# EAGLE board MicroMouse_Board (EAGLE 8.6.0)

Size 100 x 82.54 mm. Coordinates in mm from the lower left corner, seen from the top.
Outline: 1.27,0 100,0 100,82.54 0,82.54 1.27,0
Copper layers (1*16): Top 0.035mm / dielectric 1.5mm / Bottom 0.035mm
Design rules "default": minimum track width 6mil, minimum drill 0.35mm, track to track 6mil, track to pad 6mil, pad to pad 6mil, via to via 6mil, smd to smd 6mil, copper to edge 40mil, drill to drill 6mil, minimum pad ring 10mil, minimum via ring 8mil, stop-mask expansion 4mil, vias tented up to drill 0mil, thermal gap 10mil

## Footprints (pad centres in the part's own frame; a part is rotated, then mirrored left to right if it is on the bottom)
POLOLU_BUTTON = drill 1 pad 1.778: P$1 -3.25,0; P$2 3.25,0
B3B-PH-K-S = drill 1 pad 1.676 square: BAT_+ 2,0; BAT_- -2,0; NC 0,0
EIA3528 = smd 1.2 x 2.5: A 1.65,0; C -1.65,0
0805 = smd 0.8 x 1.2: 1 -0.9,0; 2 0.9,0
2X4 = drill 1.016 pad 1.88 octagon: 1 -3.81,-1.27; 2 -3.81,1.27; 3 -1.27,-1.27; 4 -1.27,1.27; 5 1.27,-1.27; 6 1.27,1.27; 7 3.81,-1.27; 8 3.81,1.27
EMITTER = drill 0.8 pad 1.422: EM_+ -1.397,0.016; EM_- 1.143,0.016
LED-0805 = smd 0.8 x 1.2: A -0.9,0; C 0.9,0
MOTOR_ENCODER_HEADER = drill 1 pad 1.676: ENC_A 2.54,1.27; ENC_B 2.54,-1.27; ENC_GND 0,-1.27; ENC_VDD 0,1.27; MTR+ -2.54,1.27; MTR_- -2.54,-1.27
POLOLU_SWITCH = drill 1 pad 1.676 square: PIN1 -2.54,0; PIN2 0,0; PIN3 2.54,0
RECEIVER = drill 0.8 pad 1.422: RE_+ -1.27,0; RE_- 1.27,0
SOT223 = smd 1.219 x 2.235: GND 0,-3.099; IN -2.311,-3.099; OUT 2.311,-3.099 | smd 3.6 x 2.2: GND2 0,3.099
5V_REG_MURATA = drill 1 pad 1.676: GND 0,0; IN -3.175,0; OUT 3.175,0
LQFP64 = smd 0.3 x 1.3: BOOT0 -1.75,5.75; PA3 -3.75,-5.75; PA4 -2.25,-5.75; PA5 -1.75,-5.75; PA6 -1.25,-5.75; PA7 -0.75,-5.75; PA14 3.75,5.75; PA15 3.25,5.75; PB0 0.75,-5.75; PB1 1.25,-5.75; PB2 1.75,-5.75; PB3 0.75,5.75; PB4 0.25,5.75; PB5 -0.25,5.75; PB6 -0.75,5.75; PB7 -1.25,5.75; PB8 -2.25,5.75; PB9 -2.75,5.75; PB10 2.25,-5.75; PC4 -0.25,-5.75; PC5 0.25,-5.75; PC10 2.75,5.75; PC11 2.25,5.75; PC12 1.75,5.75; PD2 1.25,5.75; VCAP_1 2.75,-5.75; VDD_0 -2.75,-5.75; VDD_1 3.75,-5.75; VDD_3 -3.75,5.75; VSS_0 -3.25,-5.75; VSS_1 -3.25,5.75; VSS_2 3.25,-5.75 | smd 1.3 x 0.3: NRST -5.75,0.75; PA0_WKUP -5.75,-2.75; PA1 -5.75,-3.25; PA2 -5.75,-3.75; PA8 5.75,0.25; PA9 5.75,0.75; PA10 5.75,1.25; PA11 5.75,1.75; PA12 5.75,2.25; PA13 5.75,2.75; PB12 5.75,-3.75; PB13 5.75,-3.25; PB14 5.75,-2.75; PB15 5.75,-2.25; PC0 -5.75,0.25; PC1 -5.75,-0.25; PC2 -5.75,-0.75; PC3 -5.75,-1.25; PC6 5.75,-1.75; PC7 5.75,-1.25; PC8 5.75,-0.75; PC9 5.75,-0.25; PC13 -5.75,3.25; PC14 -5.75,2.75; PC15 -5.75,2.25; PH0 -5.75,1.75; PH1 -5.75,1.25; VBAT -5.75,3.75; VDD_2 5.75,3.75; VDDA -5.75,-2.25; VSS_3 5.75,3.25; VSSA -5.75,-1.75
TC4427_SOIC8 = smd 0.61 x 2.21: GND 0.635,-2.54; IN_A -0.635,-2.54; IN_B 1.905,-2.54; NC1 -1.905,-2.54; NC2 -1.905,2.54; OUT_A -0.635,2.54; OUT_B 1.905,2.54; VDD 0.635,2.54
ULN2003A = smd 1.55 x 0.3: 1B -2.8,2.275; 1C 2.8,2.275; 2B -2.8,1.625; 2C 2.8,1.625; 3B -2.8,0.975; 3C 2.8,0.975; 4B -2.8,0.325; 4C 2.8,0.325; 5B -2.8,-0.325; 5C 2.8,-0.325; 6B -2.8,-0.975; 6C 2.8,-0.975; 7B -2.8,-1.625; 7C 2.8,-1.625; COM 2.8,-2.275; GND -2.8,-2.275
ZXMHC3 = smd 0.61 x 2.21: N1D/P1D -0.635,-2.54; N1G -1.905,-2.54; N1S/N2S 0.635,-2.54; N2D/P2D 0.635,2.54; N2G 1.905,-2.54; P1G -1.905,2.54; P1S/P2S -0.635,2.54; P2G 1.905,2.54

## Placement (x,y rotation side)
B1  POLOLU_BUTTON  [POLOLU_BUTTON]  92.71,49.53 0 top
B2  POLOLU_BUTTON  [POLOLU_BUTTON]  92.71,55.88 0 top
BAT_JST-PH  3PIN  [B3B-PH-K-S]  95.25,24.13 90 top
C1  47uF  [EIA3528]  95.25,41.91 0 top
C2  47uF  [EIA3528]  77.47,66.04 90 top
C3  47uF  [EIA3528]  30.48,58.42 90 top
C4  1.0uF  [0805]  74.93,33.02 0 top
C5  1.0uF  [0805]  74.93,60.96 0 top
C6  0.1uF  [0805]  25.4,30.48 90 top
C7  0.1uF  [0805]  34.29,30.48 180 top
C8  0.1uF  [0805]  48.26,38.1 180 top
C9  2.2uF  [0805]  48.26,41.91 180 top
C10  0.1uF  [0805]  48.26,45.72 180 top
C11  10uF  [0805]  36.83,63.5 180 top
C12  0.1uF  [0805]  30.48,30.48 180 top
C2000  0.1uF  [0805]  30.48,50.8 90 top
COMM1  M04X2  [2X4]  33.02,22.86 0 top
EM_1  SFH4545  [EMITTER]  35.56,6.35 90 top
EM_2  SFH4545  [EMITTER]  8.89,33.02 180 top
EM_3  SFH4545  [EMITTER]  10.16,50.8 0 top
EM_4  SFH4545  [EMITTER]  36.83,76.2 90 top
LED1  LED  [LED-0805]  11.43,36.83 180 top
LED2  LED  [LED-0805]  11.43,41.91 180 top
LED3  LED  [LED-0805]  11.43,46.99 180 top
LED_LOW_BAT  LED  [LED-0805]  25.4,64.77 270 top
LED_PWR  LED  [LED-0805]  24.13,21.59 90 top
MTR_1  MOTOR_ENCODER_HEADER  [MOTOR_ENCODER_HEADER]  48.26,25.4 90 top
MTR_2  MOTOR_ENCODER_HEADER  [MOTOR_ENCODER_HEADER]  48.26,55.88 90 top
POLOLU_SWITCH  POLOLU_SWITCH  [POLOLU_SWITCH]  95.25,34.29 90 top
R1  16K  [0805]  40.64,6.35 90 top
R2  16K  [0805]  16.51,35.56 90 top
R3  16K  [0805]  21.59,53.34 90 top
R4  16K  [0805]  40.64,76.2 90 top
R5  1.8K  [0805]  40.64,11.43 90 top
R6  1.8K  [0805]  21.59,30.48 90 top
R7  1.8K  [0805]  25.4,53.34 90 top
R8  1.8K  [0805]  40.64,69.85 90 top
R9  30K  [0805]  40.64,30.48 90 top
R10  10K  [0805]  40.64,26.67 270 top
R11  1K  [0805]  7.62,36.83 180 top
R12  1K  [0805]  7.62,41.91 180 top
R13  1K  [0805]  7.62,46.99 180 top
R14  1K  [0805]  25.4,60.96 90 top
R15  1K  [0805]  24.13,25.4 90 top
R16  47K  [0805]  86.36,49.53 90 top
R17  47K  [0805]  86.36,58.42 90 top
R18  47K  [0805]  82.55,24.13 90 top
R19  47K  [0805]  82.55,29.21 90 top
R20  47K  [0805]  82.55,53.34 90 top
R21  47K  [0805]  82.55,58.42 90 top
R22  47K  [0805]  36.83,49.53 90 top
RE_LD  TEFT4300  [RECEIVER]  15.24,29.21 180 top
RE_LF  TEFT4300  [RECEIVER]  33.02,12.7 90 top
RE_RD  TEFT4300  [RECEIVER]  16.51,55.88 0 top
RE_RF  TEFT4300  [RECEIVER]  35.56,69.85 90 top
REG_3V3_SPX3940  3V3_REG  [SOT223]  36.83,55.88 180 top
REG_5V_MURATA  REG_5V_MURATA  [5V_REG_MURATA]  86.36,64.77 180 top
STM32F401  STM32F4_401_410_411_412_413_446  [LQFP64]  35.56,40.64 90 top
TC4427_L  TC4427_SOIC8  [TC4427_SOIC8]  74.93,27.94 90 top
TC4427_R  TC4427_SOIC8  [TC4427_SOIC8]  74.93,49.53 90 top
U$1  [MOUSE_OUTLINE_2WHEEL]  60.96,40.64 90 top
ULN2003A  ULN2003A  [ULN2003A]  22.86,44.45 180 top
ZXMHC3_2  ZXMHC3  [ZXMHC3]  74.93,55.88 90 top
ZXMHC3_L  ZXMHC3  [ZXMHC3]  74.93,21.59 90 top

## Library data of the parts
B1 B2 = POLOLU_BUTTON
BAT_JST-PH = BATT_JST-PH_3PIN
C1-C3 = SparkFun-Capacitors; PROD_ID: CAP-08310
C4-C10 C12 C2000 = CAP_CERAMIC_0805IN_2012MM
C11 = SparkFun-Capacitors; PROD_ID: CAP-11330
COMM1 = 2X4_PIN_HEADER
EM_1-EM_4 = SFH4545
LED1-LED3 LED_LOW_BAT LED_PWR = LED_0805
MTR_1 MTR_2 = MOTOR_ENCODER_HEADER
POLOLU_SWITCH = POLOLU_SWITCH
R1-R22 = RESISTOR_0805IN_2012MM
RE_LD RE_LF RE_RD RE_RF = TEFT4300
REG_3V3_SPX3940 = REG_3V3_LM3940
REG_5V_MURATA = REG_5V_MURATA
STM32F401 = STM32F4_401_410_411_412_413_446
TC4427_L TC4427_R = TC4427
U$1 = MOUSE_OUTLINE_2WHEEL
ULN2003A = ULN2003A
ZXMHC3_2 ZXMHC3_L = ZXMHC3

## Nets
+3V3: B1.P$2 B2.P$2 C3.A C6.1 C7.1 C8.1 C10.1 C2000.1 COMM1.8 LED_PWR.A MTR_1.ENC_VDD MTR_2.ENC_VDD RE_LD.RE_+ RE_LF.RE_+ RE_RD.RE_+ RE_RF.RE_+ REG_3V3_SPX3940.OUT STM32F401.VBAT STM32F401.VDD_0 STM32F401.VDD_1 STM32F401.VDD_2 STM32F401.VDD_3 STM32F401.VDDA
+5V: C2.A C11.1 EM_1.EM_+ EM_2.EM_+ EM_3.EM_+ EM_4.EM_+ REG_3V3_SPX3940.IN REG_5V_MURATA.OUT ZXMHC3_2.P1S/P2S ZXMHC3_L.P1S/P2S
B0: B1.P$1 R16.2 STM32F401.PB0
B1: B2.P$1 R17.2 STM32F401.PB1
EM_LD: STM32F401.PC12 ULN2003A.2B
EM_LF: STM32F401.PD2 ULN2003A.1B
EM_RD: STM32F401.PC11 ULN2003A.3B
EM_RF: STM32F401.PC10 ULN2003A.4B
GND: BAT_JST-PH.BAT_- C1.C C2.C C3.C C4.2 C5.2 C6.2 C7.2 C8.2 C9.2 C10.2 C11.2 C12.2 C2000.2 COMM1.3 COMM1.6 MTR_1.ENC_GND MTR_2.ENC_GND R5.1 R6.1 R7.1 R8.1 R10.1 R11.2 R12.2 R13.2 R14.2 R15.2 R16.1 R17.1 R18.2 R19.2 R20.2 R21.2 R22.2 REG_3V3_SPX3940.GND REG_3V3_SPX3940.GND2 REG_5V_MURATA.GND STM32F401.PB2 STM32F401.VSS_1 STM32F401.VSSA TC4427_L.GND TC4427_R.GND ULN2003A.GND ZXMHC3_2.N1S/N2S ZXMHC3_L.N1S/N2S
LED1: LED1.A STM32F401.PA4
LED2: LED2.A STM32F401.PA5
LED3: LED3.A STM32F401.PA6
LED_LOW_BAT: LED_LOW_BAT.A STM32F401.PA7
LENC_A: MTR_1.ENC_A STM32F401.PA0_WKUP
LENC_B: MTR_1.ENC_B STM32F401.PA1
LMTR+: MTR_1.MTR+ ZXMHC3_L.N1D/P1D
LMTR-: MTR_1.MTR_- ZXMHC3_L.N2D/P2D
LPWM_A: R18.1 STM32F401.PB9 TC4427_L.IN_A
LPWM_B: R19.1 STM32F401.PB8 TC4427_L.IN_B
N$1: BAT_JST-PH.BAT_+ POLOLU_SWITCH.PIN1
N$3: C1.A POLOLU_SWITCH.PIN3 REG_5V_MURATA.IN
N$4: LED1.C R11.1
N$5: LED2.C R12.1
N$6: LED3.C R13.1
N$7: R1.1 ULN2003A.1C
N$8: LED_LOW_BAT.C R14.1
N$9: R2.1 ULN2003A.2C
N$10: LED_PWR.C R15.1
N$11: R3.1 ULN2003A.3C
N$12: TC4427_L.OUT_A ZXMHC3_L.N1G ZXMHC3_L.P1G
N$13: R4.1 ULN2003A.4C
N$14: EM_1.EM_- R1.2
N$15: TC4427_L.OUT_B ZXMHC3_L.N2G ZXMHC3_L.P2G
N$16: EM_2.EM_- R2.2
N$17: EM_3.EM_- R3.2
N$18: EM_4.EM_- R4.2
N$21: TC4427_R.OUT_A ZXMHC3_2.N1G ZXMHC3_2.P1G
N$25: TC4427_R.OUT_B ZXMHC3_2.N2G ZXMHC3_2.P2G
N$28: C9.1 STM32F401.VCAP_1
N$32: R22.1 STM32F401.BOOT0
NRST: C12.1 COMM1.7 STM32F401.NRST
RE_LD: R6.2 RE_LD.RE_- STM32F401.PC2
RE_LF: R5.2 RE_LF.RE_- STM32F401.PC3
RE_RD: R7.2 RE_RD.RE_- STM32F401.PC1
RE_RF: R8.2 RE_RF.RE_- STM32F401.PC0
RENC_A: MTR_2.ENC_A STM32F401.PA15
RENC_B: MTR_2.ENC_B STM32F401.PB3
RMRT-: ZXMHC3_2.N2D/P2D
RMTR+: MTR_2.MTR+ ZXMHC3_2.N1D/P1D
RMTR-: MTR_2.MTR_-
RPWM_A: R20.1 STM32F401.PB7 TC4427_R.IN_A
RPWM_B: R21.1 STM32F401.PB6 TC4427_R.IN_B
RX: COMM1.4 STM32F401.PA10
SWCLK: COMM1.5 STM32F401.PA14
SWDIO: COMM1.1 STM32F401.PA13
TX: COMM1.2 STM32F401.PA9
VBAT: C4.1 C5.1 R9.2 TC4427_L.VDD TC4427_R.VDD
VCAP_1: STM32F401.VSS_2
VCAP_2: STM32F401.VSS_3
VOLTMETER: R9.1 R10.2 STM32F401.PA2
VSS_0: STM32F401.VSS_0

## Tracks (layer width: path | path; a pad name or v marks a point on that pad's centre or on a via)
+3V3  (22 unrouted)
+5V  (9 unrouted)
B0  (2 unrouted)
B1  (2 unrouted)
EM_LD  (1 unrouted)
EM_LF  (1 unrouted)
EM_RD  (1 unrouted)
EM_RF  (1 unrouted)
GND  (45 unrouted)
LED1  (1 unrouted)
LED2  (1 unrouted)
LED3  (1 unrouted)
LED_LOW_BAT  (1 unrouted)
LENC_A  (1 unrouted)
LENC_B  (1 unrouted)
LMTR+  (1 unrouted)
LMTR-  (1 unrouted)
LPWM_A  (2 unrouted)
LPWM_B  (2 unrouted)
N$1  (1 unrouted)
N$3  (2 unrouted)
N$4  (1 unrouted)
N$5  (1 unrouted)
N$6  (1 unrouted)
N$7  (1 unrouted)
N$8  (1 unrouted)
N$9  (1 unrouted)
N$10  (1 unrouted)
N$11  (1 unrouted)
N$12  (2 unrouted)
N$13  (1 unrouted)
N$14  (1 unrouted)
N$15  (2 unrouted)
N$16  (1 unrouted)
N$17  (1 unrouted)
N$18  (1 unrouted)
N$21  (2 unrouted)
N$25  (2 unrouted)
N$28  (1 unrouted)
N$32  (1 unrouted)
NRST  (2 unrouted)
RE_LD  (2 unrouted)
RE_LF  (2 unrouted)
RE_RD  (2 unrouted)
RE_RF  (2 unrouted)
RENC_A  (1 unrouted)
RENC_B  (1 unrouted)
RMTR+  (1 unrouted)
RPWM_A  (2 unrouted)
RPWM_B  (2 unrouted)
RX  (1 unrouted)
SWCLK  (1 unrouted)
SWDIO  (1 unrouted)
TX  (1 unrouted)
VBAT  (4 unrouted)
VOLTMETER  (2 unrouted)